# Altium PCB Quadcopter_controller.PcbDoc
Units mm, origin at the board's own origin, x right, y up, seen from the top; angles counter-clockwise.
Board outline 50 x 50 mm, 2 copper layers (Top Layer, Bottom Layer), stack 0.48 mm thick; 24 components, 21 nets, 97 pads, 0 vias.
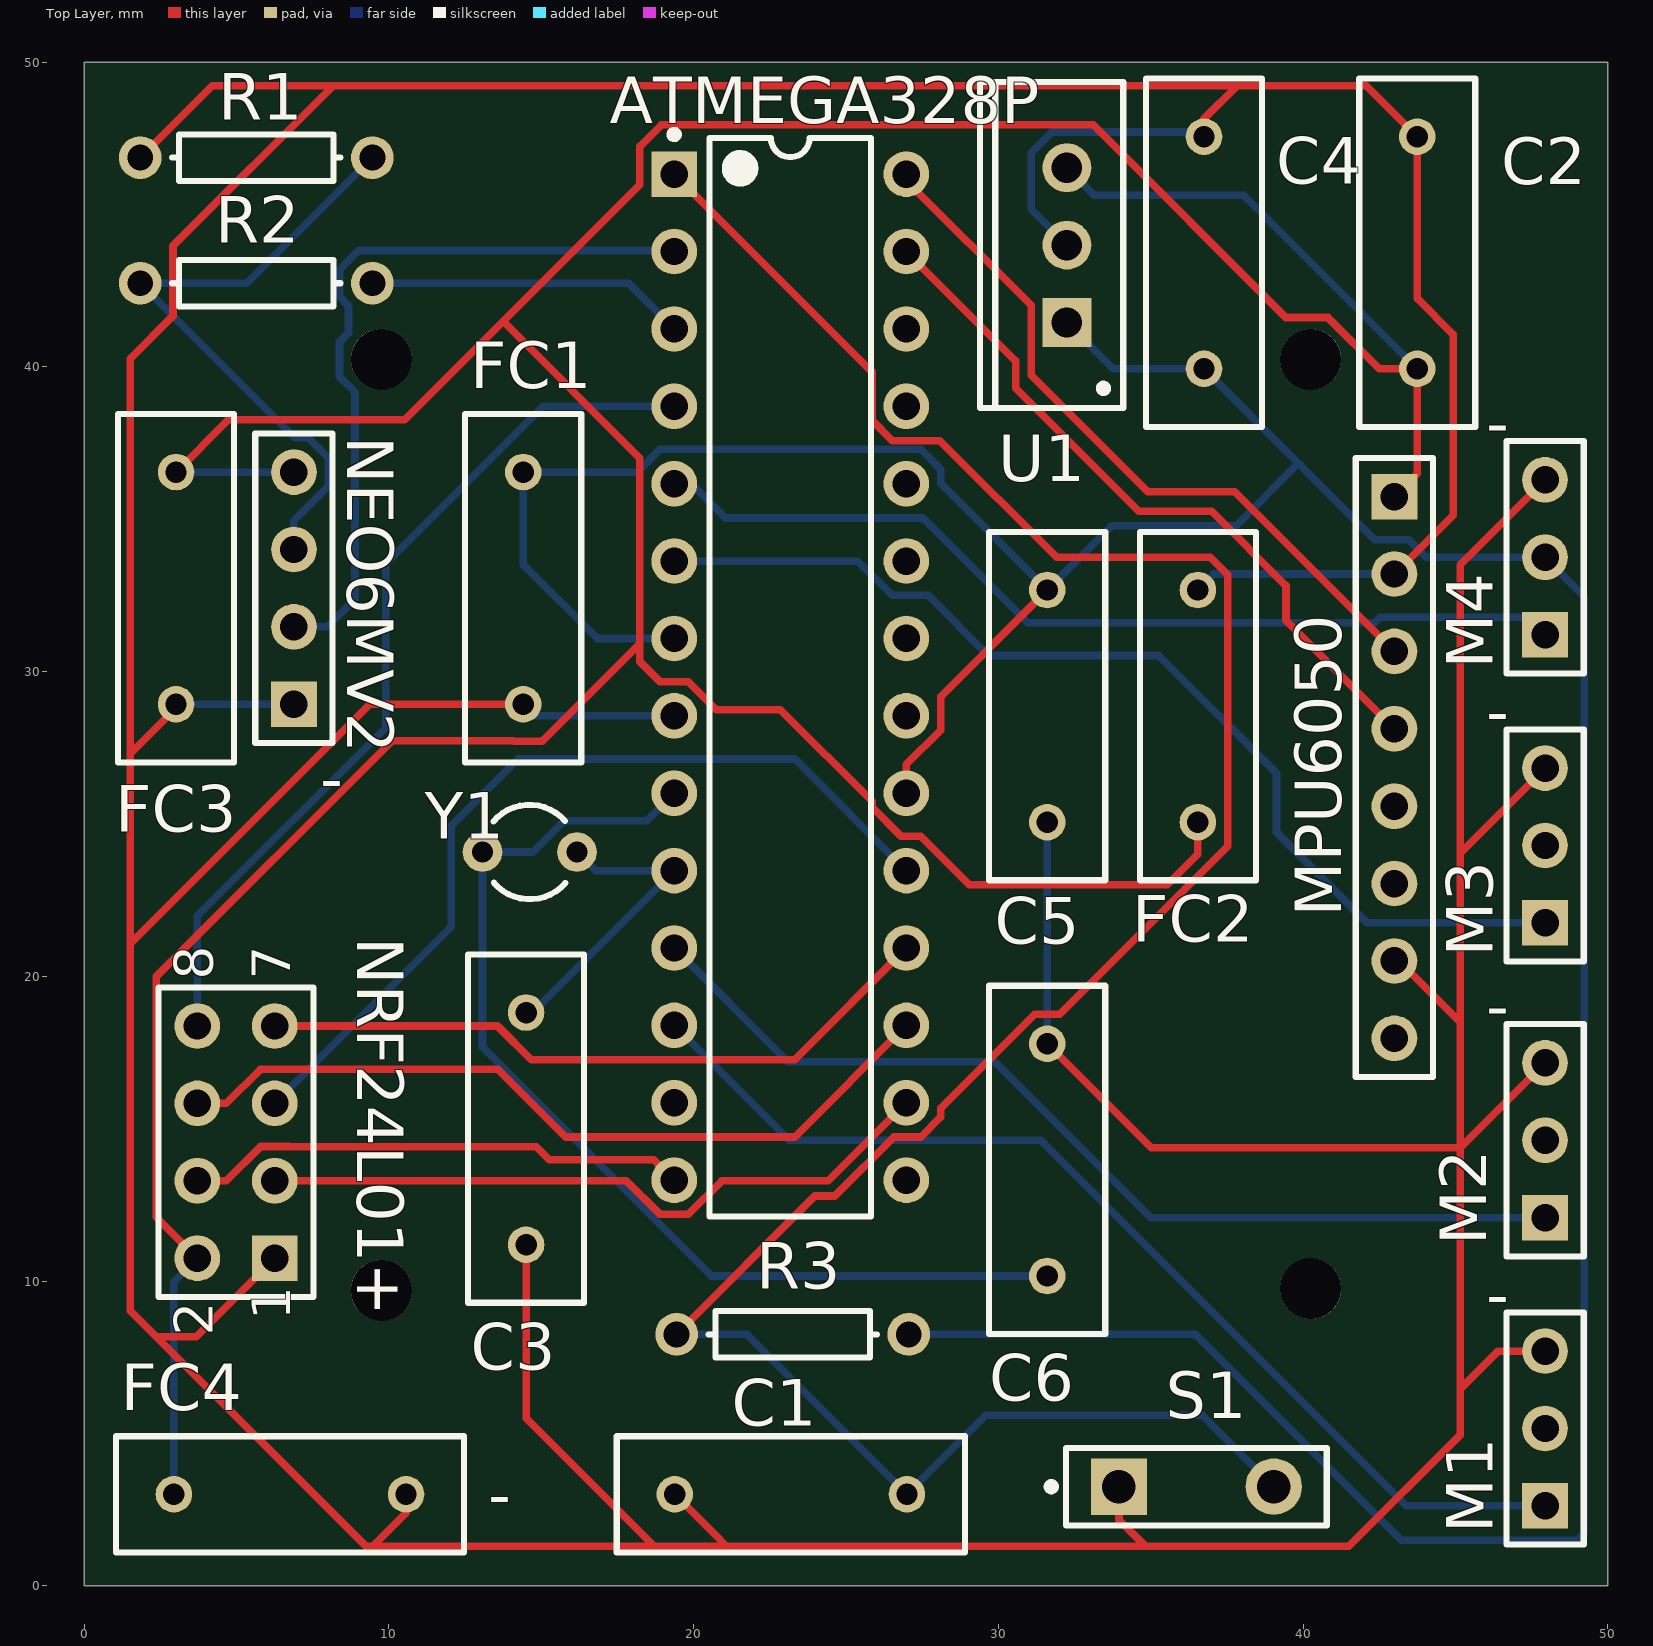
[diagram p0: Top Layer view]
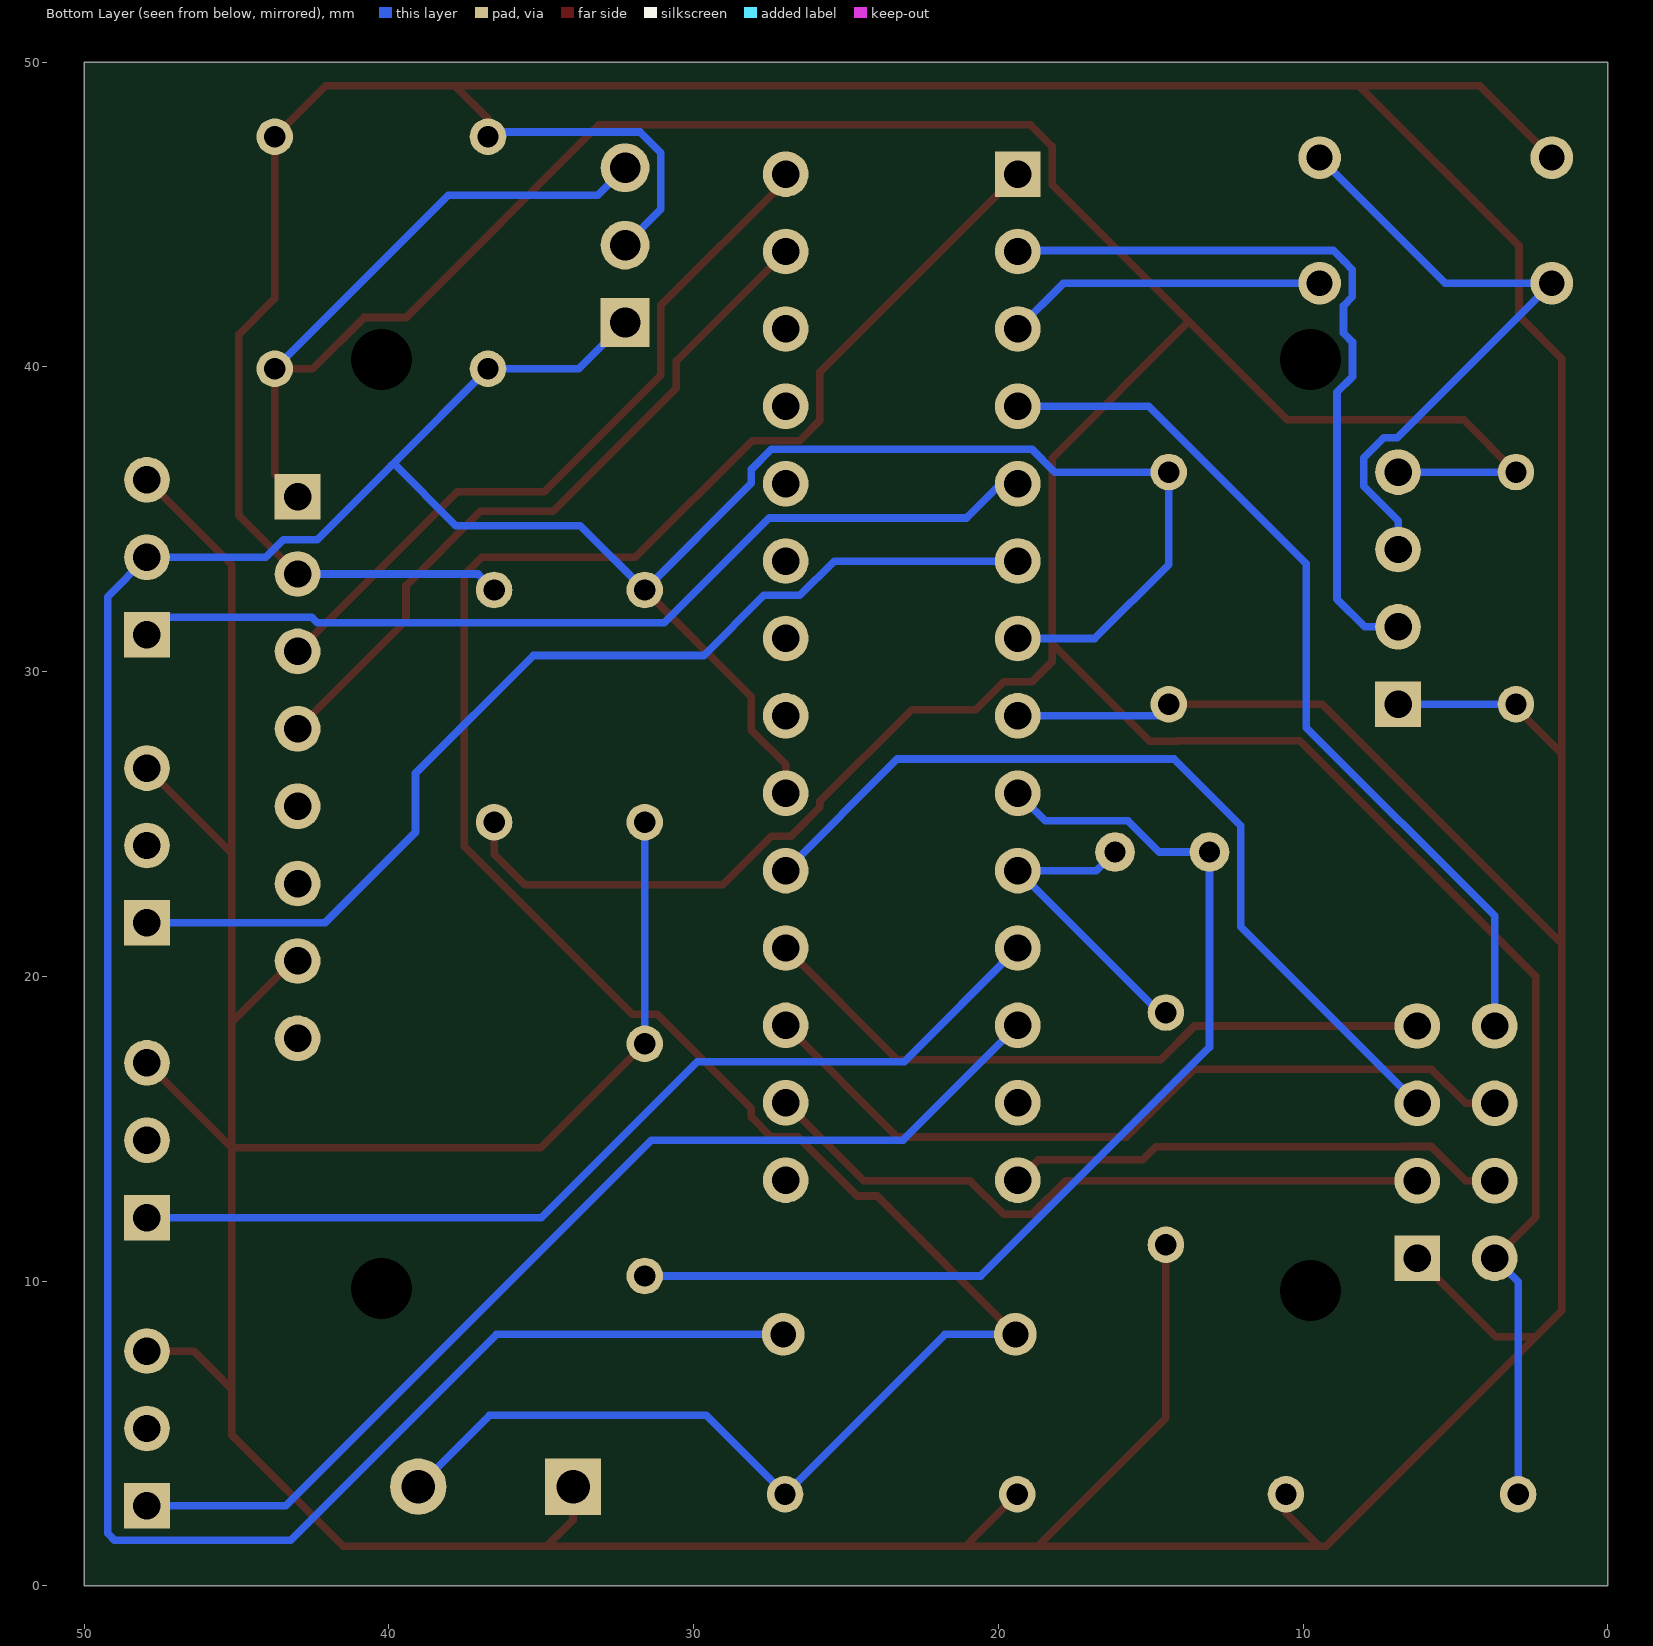
[diagram p1: Bottom Layer view, seen from below]

## Layer stack, top to bottom
Top Solder: solder mask 0.02, Solder Resist, Dk 3.5
Top Layer: signal copper 0.04
Dielectric1: dielectric 0.4, FR-4, Dk 4.8
Bottom Layer: signal copper 0.04
Bottom Solder: solder mask 0.02, Solder Resist, Dk 3.5

## Board outline
0,0 50,0 50,50 0,50

## Design rules (kind name [scope] priority, off if disabled: settings)
Clearance [All] p1: gap=0.25 ignorepadtopadclearanceinfootprint=FALSE
FabricationTestPointUsage TestPointUsage [All] p1: valid=0 allowmultiple=FALSE
FabricationTestpoint Testpoint [All] p1: side=3 testpointundercomponent=TRUE minsize=1.016 maxsize=2.54 preferedsize=1.524 minholesize=0 maxholesize=1.016 preferedholesize=0.813 testpointgrid=0.025 allowsidetop=TRUE allowsidebottom=TRUE usegrid=TRUE gridtolerance=0
PolygonConnect [All] p1: connectstyle=Relief reliefconductorwidth=0.254 reliefentries=4 polygonreliefangle="90 Angle" airgapwidth=0.254
RoutingVias [All] p1: holewidth=0.6 width=1 viastyle="Through Hole" minholewidth=0.6 minwidth=1 maxholewidth=0.6 maxwidth=1
SilkToSolderMaskClearance SilkscreenOverComponentPads [IsPad] p1: minsilkscreentomaskgap=0.254 clearancetoexposedcopper=TRUE
SolderMaskExpansion [All] p1: expansion=0.102
Width [All] p1: maxlimit=0.25 minlimit=0.25 preferedwidth=0.25
27 further rules are at their usual default settings.

## Classes and differential pairs
component class U_NEO6MV2: FC3 NEO6MV2 R1 R2
component class U_MPU6050: FC2 MPU6050
component class U_Motors: M1 M2 M3 M4
component class Reset: C1 R3 S1
component class Quadcopter_controller: ATMEGA328P C3 C5 C6 FC1 Y1
component class NRF24L01+: FC4 NRF24L01+
component class "5-3.3 Voltage regulator": C2 C4 U1

## Components (designator, comment, footprint, x,y, rotation, side; value= is the part's Value field where it differs from the comment)
ATMEGA328P "ATmega328P-PU" 28P3 23.171,29.82 r0 top
C1 "10nF" RAD-0.3 23.19,3 r0 top
C2 "33uF" RAD-0.3 43.75,43.75 r270 top
C3 "20pF" RAD-0.3 14.5,15 r90 top
C4 "0.47uF" RAD-0.3 36.75,43.75 r270 top
C5 "100nF" RAD-0.3 31.605,28.87 r90 top
C6 "20pF" RAD-0.3 31.605,13.975 r270 top
FC1 "100nF" RAD-0.3 14.405,32.74 r90 top
FC2 "100nF" RAD-0.3 36.55,28.87 r90 top
FC3 "100nF" RAD-0.3 3.01,32.74 r270 top
FC4 "100uF" RAD-0.3 6.75,3 r0 top
M1 "Header 3" HDR1X3 47.945,2.62 r90 top
M2 "Header 3" HDR1X3 47.945,12.08 r90 top
M3 "Header 3" HDR1X3 47.945,21.755 r90 top
M4 "Header 3" HDR1X3 47.945,31.215 r90 top
MPU6050 "Header 8" HDR1X8 43,35.745 r270 top
NEO6MV2 "GPS" HDR1X4 6.88,28.93 r90 top
NRF24L01+ "nRF24L01+" HDR2X4 6.25,10.75 r90 top
R1 "10K" AXIAL-0.3 5.645,46.87 r180 top
R2 "4.7K" AXIAL-0.3 5.645,42.75 r180 top
R3 "10K" AXIAL-0.3 23.25,8.25 r0 top
S1 "SW-PB" SPST-2 36.5,3.25 r0 top
U1 "LM3940IT-3.3" T03B 32.25,44 r90 top
Y1 "XTAL" R38 14.62,24.08 r270 top

## Footprints (in the part's own frame and the unit in brackets; to place one, negate y for a bottom-side part, rotate by r counter-clockwise, add the part's x,y. Pads: shape width x height; smd on the part's side, far side on the other; paste and mask are expansions set on the pad)
28P3 [mm] "28-Pin Plastic Dual In-Line Package (PDIP)"
  rect 1.5x1.5 hole 0.9: 1(-3.81,16.51)
  round 1.5 hole 0.9: 2(-3.81,13.97) 3(-3.81,11.43) 4(-3.81,8.89) 5(-3.81,6.35) 6(-3.81,3.81) 7(-3.81,1.27) 8(-3.81,-1.27) 9(-3.81,-3.81) 10(-3.81,-6.35) 11(-3.81,-8.89) 12(-3.81,-11.43) 13(-3.81,-13.97) 14(-3.81,-16.51) 15(3.81,-16.51) 16(3.81,-13.97) 17(3.81,-11.43) 18(3.81,-8.89) 19(3.81,-6.35) 20(3.81,-3.81) 21(3.81,-1.27) 22(3.81,1.27) 23(3.81,3.81) 24(3.81,6.35) 25(3.81,8.89) 26(3.81,11.43) 27(3.81,13.97) 28(3.81,16.51)
  silkscreen extent -3.93,-17.7 2.65,17.93, body extent -3.6,-17.65 3.6,17.65, height 4.58
AXIAL-0.3 [mm] "Axial Device, Thru-Hole; 2 Leads; 0.3 in Pin Spacing"
  round 1.4 hole 0.85: 1(-3.81,0) 2(3.81,0)
  silkscreen extent -2.77,-0.76 2.77,0.76
HDR1X3 [mm] "Connector; Header; 3 Position"
  rect 1.5x1.5 hole 0.9: 1(0,0)
  round 1.5 hole 0.9: 2(2.54,0) 3(5.08,0)
  silkscreen extent -1.27,-1.27 6.35,1.27
HDR1X4 [mm] "Connector; Header; 4 Position"
  rect 1.5x1.5 hole 0.9: 1(0,0)
  round 1.5 hole 0.9: 2(2.54,0) 3(5.08,0) 4(7.62,0)
  silkscreen extent -1.27,-1.27 8.89,1.27
HDR1X8 [mm] "Connector; Header; 8 Position"
  rect 1.5x1.5 hole 0.9: 1(0,0)
  round 1.5 hole 0.9: 2(2.54,0) 3(5.08,0) 4(7.62,0) 5(10.16,0) 6(12.7,0) 7(15.24,0) 8(17.78,0)
  silkscreen extent -1.27,-1.27 19.05,1.27
HDR2X4 [mm] "Connector; Header; 4x2 Position"
  rect 1.5x1.5 hole 0.9: 1(0,0)
  round 1.5 hole 0.9: 2(0,2.54) 3(2.54,0) 4(2.54,2.54) 5(5.08,0) 6(5.08,2.54) 7(7.62,0) 8(7.62,2.54)
  silkscreen extent -1.27,-1.27 8.89,3.81
R38 [mm] "Crystal, Thru-Hole; 2 Leads; Body 3.1 x 8.2 mm (Dia.xH)"
  round 1.3 hole 0.7: 1(0,1.55) 2(0,-1.55)
  silkscreen extent -1.55,-1.19 1.55,1.17
RAD-0.3 [mm] "Radial Cap, Thru-Hole; 2 Leads; 0.3 in Pin Spacing"
  round 1.2 hole 0.7: 1(-3.81,0) 2(3.81,0)
  silkscreen extent -5.71,-1.91 5.71,1.91
SPST-2 [mm] "Switch; 2 Leads"
  rect 1.85x1.85 hole 1.1: 1(-2.54,0)
  round 1.85 hole 1.1: 2(2.54,0)
  silkscreen extent -4.89,-1.27 4.28,1.27
T03B [mm] "TO, Thru-Hole, Vertical, Heatsink Mounted; 3 In-Line Leads; Pitch 2.54 mm"
  rect 1.6x1.6 hole 1: 1(-2.54,0)
  round 1.6 hole 1: 2(0,0) 3(2.54,0)
  silkscreen extent -5.35,-1.85 5.35,2.85, body extent -5.4,-1.9 5.4,2.9, height 19.4

## Part data
ATMEGA328P: "8-bit AVR Microcontroller, 32KB Flash, 1KB EEPROM, 2KB SRAM, 28-pin PDIP, Industrial Grade (-40°C to 85°C)", ComponentLink1Description="Manufacturer URL", ComponentLink1URL=http://www.atmel.com/, ComponentLink2Description="ATmega48A/48PA/88A/88PA/168A/168PA/328/328P Datasheet", ComponentLink2URL=http://www.atmel.com/dyn/resources/prod_documents/8271.pdf, ComponentLink3Description="ATmega48A/48PA/88A/88PA/168A/168PA/328/328P Summary", ComponentLink3URL=http://www.atmel.com/dyn/resources/prod_documents/8271S.pdf, DatasheetVersion="revD, May-2011", PackageDescription="28-lead (0.300\"/7.62mm Wide) Plastic Dual Inline Package (PDIP)", PackageReference=28P3, PackageVersion="revB, Sep-2001"
C1 C2 C3 C4 C5 C6 FC1 FC2 FC3 FC4: library part Cap, "Capacitor", LatestRevisionDate=17-Jul-2002, LatestRevisionNote="Re-released for DXP Platform.", PackageDescription="Radial Cap, Thru-Hole; 2 Leads; 0.3 in Pin Spacing", PackageReference=RAD-0.3, Published=8-Jun-2000, Publisher="Altium Limited"
M1 M2 M3 M4: "Header, 3-Pin", LatestRevisionDate=17-Jul-2002, LatestRevisionNote="Re-released for DXP Platform.", Publisher="Altium Limited"
MPU6050: "Header, 8-Pin", LatestRevisionDate=17-Jul-2002, LatestRevisionNote="Re-released for DXP Platform.", Publisher="Altium Limited"
NEO6MV2: library part "Header 4", "Header, 4-Pin", LatestRevisionDate=17-Jul-2002, LatestRevisionNote="Re-released for DXP Platform.", Publisher="Altium Limited"
NRF24L01+: library part "Header 4X2", "Header, 4-Pin, Dual row", LatestRevisionDate=17-Jul-2002, LatestRevisionNote="Re-released for DXP Platform.", Publisher="Altium Limited"
R1 R2 R3: library part Res1, "Resistor", LatestRevisionDate=17-Jul-2002, LatestRevisionNote="Re-released for DXP Platform.", PackageDescription="Axial Device, Thru-Hole; 2 Leads; 0.3 in Pin Spacing", PackageReference=AXIAL-0.3, Published=8-Jun-2000, Publisher="Altium Limited"
S1: "Switch", LatestRevisionDate=17-Jul-2002, LatestRevisionNote="Re-released for DXP Platform.", PackageDescription="Switch; 2 Leads", PackageReference=SPST-2, Published=24-Mar-1999, Publisher="Altium Limited"
U1: "1A Low Dropout Regulator for 5V to 3.3V Conversion, 3-pin TO-220", Manufacturer="National Semiconductor", PackageTopMarking="NSUZXYTTE#*LM3940IT*-3.3 P+", PowerWise=N, ComponentLink1Description="Manufacturer URL", ComponentLink1URL=http://www.national.com/, ComponentLink2Description="LM3940 Datasheet", ComponentLink2URL=http://www.national.com/ds/LM/LM3940.pdf, ComponentLink3Description="LM3940 Web Page", ComponentLink3URL=http://www.national.com/pf/LM/LM3940.html, ComponentLink4Description="T03B Package Page", ComponentLink4URL=http://www.national.com/packaging/folders/t03b.html, CompType="LDO IC", DatasheetVersion=Jul-2007, High-Reliability=Y, PackageDescription="TO-220, Molded, 3 Lead, Straight", PackageReference=T03B, PackageVersion="revL, Jan-1992", PartNumber=LM3940IT-3.3, PinCount=3, RoHS=N
Y1: "Crystal Oscillator", LatestRevisionDate=17-Jul-2002, LatestRevisionNote="Re-released for DXP Platform.", PackageDescription="Crystal, Thru-Hole; 2 Leads; Body 3.1 x 8.2 mm (Dia.xH)", PackageReference=R38, Published=8-Jun-2000, Publisher="Altium Limited"

## Free pads (board coordinates)
  round 2 / inner round 1.524 / far side round 1.524 hole 2 unplated: 6(9.75,9.69) 7(40.25,9.75) 8(40.25,40.25) 9(9.75,40.25)

## Nets (pads, with @x,y where several pads share a name; then routed paths per layer and width w, separated by ;. In a path a pad name is that pad's centre, name@x,y a point inside that pad or via, vN(x,y) a via of type N, cw(c..) or ccw(c..) an arc to the next point about the centre after c; other vN are vias at no path point)
3.3V: C2.2 FC2.1 FC3.1 FC4.1 MPU6050.1 NEO6MV2.4 NRF24L01+.2 U1.3 | length 146.3
  Top Layer w0.25: FC3.1 4.73,38.27 10.52,38.27 13.745,41.495 ; NRF24L01+.2 2.365,12.095 2.365,19.995 10.105,27.735 14.076,27.735 14.096,27.715 15.03,27.715 18.168,30.853 ; FC2.1 36.55,24.008 35.542,23 29.042,23 27.447,24.595 26.805,24.595 25.856,25.544 25.856,25.744 22.845,28.755 20.747,28.755 19.827,29.675 18.895,29.675 18.236,30.334 18.236,37.004 13.745,41.495 ; MPU6050.1 43.75,36.495 C2.2 42.505,39.94 40.82,41.625 39.43,41.625 33.11,47.945 18.946,47.945 18.236,47.235 18.236,45.986 13.745,41.495
  Bottom Layer w0.25: FC4.1 2.94,9.98 NRF24L01+.2 ; FC3.1 NEO6MV2.4 ; U1.3 33.155,45.635 38.055,45.635 C2.2
GND: ATMEGA328P.8 C1.1 C2.1 C3.1 C4.1 C5.1 C6.1 FC1.1 FC2.2 FC3.2 FC4.2 M1.3 M2.3 M3.3 M4.3 MPU6050.2 MPU6050.7 NEO6MV2.1 NRF24L01+.1 R1.2 S1.1 U1.2 | length 289.4
  Top Layer w0.25: R1.2 4.2,49.235 8.17,49.235 ; FC3.2@3.07,28.87 1.505,27.305 ; NRF24L01+.1 3.67,8.17 2.365,8.17 ; FC4.2 10.56,2.39 9.46,1.29 ; C3.1 14.5,5.495 18.705,1.29 ; FC1.1@14.5,28.69 14.26,28.93 9.365,28.93 1.505,21.07 ; C1.1 20.875,1.505 20.875,1.485 21.07,1.29 ; C6.1 35.02,14.37 45.155,14.37 ; S1.1 33.96,2.16 34.83,1.29 ; C4.1 36.75,48.145 37.84,49.235 ; MPU6050.7 43.14,20.505 45.155,18.49 ; MPU6050.2 44.935,35.14 44.935,41.065 43.75,42.25 C2.1 42.075,49.235 37.84,49.235 ; M1.3 46.4,7.7 45.155,6.455 ; M2.3 45.155,14.37 ; M3.3 45.155,24.045 ; M4.3 45.155,33.505 45.155,24.045 ; 1.505,21.07 1.505,9.03 2.365,8.17 ; 1.505,21.07 1.505,27.305 ; 1.505,27.305 1.505,40.27 2.91,41.675 2.91,43.975 8.17,49.235 ; 2.365,8.17 9.245,1.29 9.46,1.29 ; 8.17,49.235 37.84,49.235 ; 9.46,1.29 18.705,1.29 ; 18.705,1.29 21.07,1.29 ; 21.07,1.29 34.83,1.29 ; 34.83,1.29 41.5,1.29 45.155,4.945 45.155,6.455 ; 45.155,6.455 45.155,14.37 ; 45.155,14.37 45.155,18.49 ; 45.155,18.49 45.155,24.045
  Bottom Layer w0.25: FC3.2 NEO6MV2.1 ; NEO6MV2.1@7.48,28.44 NEO6MV2.1@7.5,28.46 ; FC1.1@14.405,28.69 FC1.1@14.645,28.69 ; FC1.1 FC1.1@14.645,28.69 ; ATMEGA328P.8@19.221,28.69 ATMEGA328P.8 14.785,28.55 FC1.1@14.645,28.69 ; C6.1 C5.1 ; U1.2 31.075,45.175 31.075,47.027 31.763,47.715 36.75,47.715 C4.1 ; FC2.2 37.075,33.205 MPU6050.2
NetATMEGA328P_1: ATMEGA328P.1 C1.2 R3.1 S1.2 | length 82.2
  Top Layer w0.25: ATMEGA328P.1 25.856,39.835 25.856,38.244 26.515,37.585 28.079,37.585 31.914,33.75 36.954,33.75 37.525,33.179 37.525,24.276 32.009,18.76 31.201,18.76 28.106,15.665 28.106,15.384 27.447,14.725 26.563,14.725 24.628,12.79 23.98,12.79 R3.1
  Bottom Layer w0.25: R3.1 21.75,8.25 C1.2 29.59,5.59 36.7,5.59 S1.2
NetATMEGA328P_2: ATMEGA328P.2 NEO6MV2.2 | length 24.9
  Bottom Layer w0.25: NEO6MV2.2 7.97,31.47 8.885,32.385 8.885,39.17 8.375,39.68 8.375,40.82 8.67,41.115 8.67,42.015 8.38,42.305 8.38,43.195 8.67,43.485 8.67,43.49 9.005,43.825 19.326,43.825 ATMEGA328P.2
NetATMEGA328P_3: ATMEGA328P.3 R2.1 | length 10.5
  Bottom Layer w0.25: R2.1 17.861,42.75 ATMEGA328P.3
NetATMEGA328P_4: ATMEGA328P.4 NRF24L01+.8 | length 29.3
  Bottom Layer w0.25: NRF24L01+.8 3.71,21.985 9.89,28.165 9.89,33.54 15.06,38.71 ATMEGA328P.4
NetATMEGA328P_5: ATMEGA328P.5 M4.1 | length 30.8
  Bottom Layer w0.25: ATMEGA328P.5 19.986,36.17 19.986,36.103 21.044,35.045 27.52,35.045 30.96,31.605 42.349,31.605 42.534,31.79 47.37,31.79 M4.1
NetATMEGA328P_6: ATMEGA328P.6 M3.1 | length 34.6
  Bottom Layer w0.25: ATMEGA328P.6 25.39,33.63 26.515,32.505 27.695,32.505 29.67,30.53 35.26,30.53 39.13,26.66 39.13,24.725 42.1,21.755 M3.1
NetATMEGA328P_9: ATMEGA328P.9 C6.2 Y1.2 | length 35.1
  Bottom Layer w0.25: ATMEGA328P.9 18.456,25.105 15.745,25.105 14.72,24.08 Y1.2 13.07,17.675 20.58,10.165 C6.2
NetATMEGA328P_10: ATMEGA328P.10 C3.2 Y1.1 | length 10.2
  Bottom Layer w0.25: C3.2 14.701,18.81 ATMEGA328P.10 16.78,23.47 Y1.1
NetATMEGA328P_11: ATMEGA328P.11 M2.1 | length 32.2
  Bottom Layer w0.25: ATMEGA328P.11 23.091,17.2 29.885,17.2 35.005,12.08 M2.1
NetATMEGA328P_12: ATMEGA328P.12 M1.1 | length 35.1
  Bottom Layer w0.25: ATMEGA328P.12 23.131,14.62 31.39,14.62 43.39,2.62 M1.1
NetATMEGA328P_14: ATMEGA328P.14 NRF24L01+.4 | length 16.6
  Top Layer w0.25: NRF24L01+.4 4.659,13.29 5.784,14.415 6.716,14.415 6.726,14.405 14.835,14.405 15.265,13.975 18.696,13.975 ATMEGA328P.14
NetATMEGA328P_16: ATMEGA328P.16 NRF24L01+.3 | length 22.7
  Top Layer w0.25: NRF24L01+.3 6.492,13.29 6.509,13.273 6.923,13.273 6.94,13.29 17.79,13.29 18.895,12.185 19.827,12.185 20.932,13.29 24.421,13.29 ATMEGA328P.16
NetATMEGA328P_17: ATMEGA328P.17 NRF24L01+.6 | length 26.2
  Top Layer w0.25: NRF24L01+.6 4.659,15.83 5.784,16.955 13.575,16.955 15.805,14.725 23.316,14.725 ATMEGA328P.17
NetATMEGA328P_18: ATMEGA328P.18 NRF24L01+.7 | length 22.7
  Top Layer w0.25: NRF24L01+.7 13.561,18.37 14.666,17.265 23.316,17.265 ATMEGA328P.18
NetATMEGA328P_19: ATMEGA328P.19 NRF24L01+.5 | length 28.9
  Bottom Layer w0.25: NRF24L01+.5 12.045,21.625 12.045,24.945 14.235,27.135 23.316,27.135 ATMEGA328P.19
NetATMEGA328P_27: ATMEGA328P.27 MPU6050.4 | length 23.7
  Top Layer w0.25: ATMEGA328P.27 30.575,40.196 30.575,39.3 34.615,35.26 37.008,35.26 39.441,32.827 39.441,31.684 MPU6050.4
NetATMEGA328P_28: ATMEGA328P.28 MPU6050.3 | length 24
  Top Layer w0.25: ATMEGA328P.28 26.981,46.119 31.075,42.025 31.075,39.735 34.905,35.905 37.76,35.905 MPU6050.3
NetNEO6MV2_3: NEO6MV2.3 R1.1 R2.2 | length 21.3
  Bottom Layer w0.25: NEO6MV2.3 6.88,34.959 8.005,36.084 8.005,37.016 7.346,37.675 6.91,37.675 R2.2 5.335,42.75 R1.1
VCC: ATMEGA328P.7 ATMEGA328P.20 C4.2 C5.2 FC1.2 M4.2 R3.2 U1.1 | length 123.7
  Top Layer w0.25: ATMEGA328P.20 26.981,26.959 28.106,28.084 28.106,29.181 C5.2
  Bottom Layer w0.25: ATMEGA328P.7 16.83,31.09 14.405,33.515 FC1.2 18.15,36.55 18.895,37.295 27.447,37.295 28.106,36.636 28.106,36.179 C5.2 33.72,34.795 37.805,34.795 39.85,36.84 C4.2 33.77,39.94 U1.1 ; R3.2 36.47,8.25 43.225,1.495 49.01,1.495 49.235,1.72 49.235,32.465 M4.2 44.041,33.755 43.466,34.33 42.36,34.33 39.925,36.765
pads on no net: ATMEGA328P.13 ATMEGA328P.15 ATMEGA328P.21 ATMEGA328P.22 ATMEGA328P.23 ATMEGA328P.24 ATMEGA328P.25 ATMEGA328P.26 M1.2 M2.2 M3.2 MPU6050.5 MPU6050.6 MPU6050.8

## Silkscreen, mask and mechanical layers (free items; w line width, h text height)
Top Overlay:
  text "-" at 46.01,37.41 h1.52
  text "-" at 46.01,27.95 h1.52
  text "-" at 7.75,25.75 h1.52
  text "-" at 46.01,18.275 h1.52
  text "-" at 46.01,8.815 h1.52
  text "-" at 13.25,2.25 h1.52
Mechanical 1:
  the board outline again, w0.254
Mechanical 16:
  drawing of 1874 lines, arcs and shapes, not listed
  text "1" at -79.286,115.509 h1.78
  text "2" at -6.642,115.509 h1.78
  text "3" at 66.51,115.509 h1.78
  text "4" at 139.408,115.509 h1.78
  text "A" at -113.627,92.497 h1.78
  text "A" at 173.393,92.497 h1.78
  text "B" at -113.627,44.44 h1.78
  text "B" at 173.393,44.44 h1.78
  text "C" at -113.627,-4.074 h1.78
  text "C" at 173.393,-4.074 h1.78
  text "ENGINEER:" at 58.458,-41.082 h1.14
  text "TITLE:" at 96.558,-41.082 h1.14
  text "PCB DESIGNER:" at 58.458,-48.575 h1.14
  text "D" at -113.627,-52.08 h1.78
  text "D" at 173.393,-52.08 h1.78
  text "DATE:" at 58.458,-56.322 h1.14
  text "PART NO.:" at 96.558,-56.322 h1.14
  text "REV:" at 149.898,-56.322 h1.14
  text "Altium Limited" at 25.438,-58.862 h1.78
  text ".PRINT_DATE" at 59.728,-59.37 h1.78
  text "12a Rodborough Rd" at 25.438,-61.402 h1.78
  text "Frenchs Forest" at 25.438,-63.942 h1.78
  text "FILE NAME:" at 58.458,-63.942 h1.14
  text "DWG NO:" at 96.558,-63.942 h1.14
  text "SCALE:" at 149.898,-63.942 h1.14
  text "NSW 2086" at 25.438,-66.482 h1.78
  text ".PCB_FILE_NAME_NO_PATH" at 59.728,-66.99 h1.78
  text "1" at -79.286,-72.451 h1.78
  text "2" at -6.642,-72.451 h1.78
  text "3" at 66.51,-72.451 h1.78
  text "4" at 139.408,-72.451 h1.78

## Text inside footprints (layer, text, board x,y; h text height)
NRF24L01+: Top Overlay "2" at 4.218,8.21 h1.27 r90; Top Overlay "1" at 6.758,8.718 h1.27 r90; Top Overlay "7" at 6.758,19.894 h1.27 r90; Top Overlay "8" at 4.218,19.894 h1.27 r90